# EAGLE board iot-home-control-board (EAGLE 7.3.0)
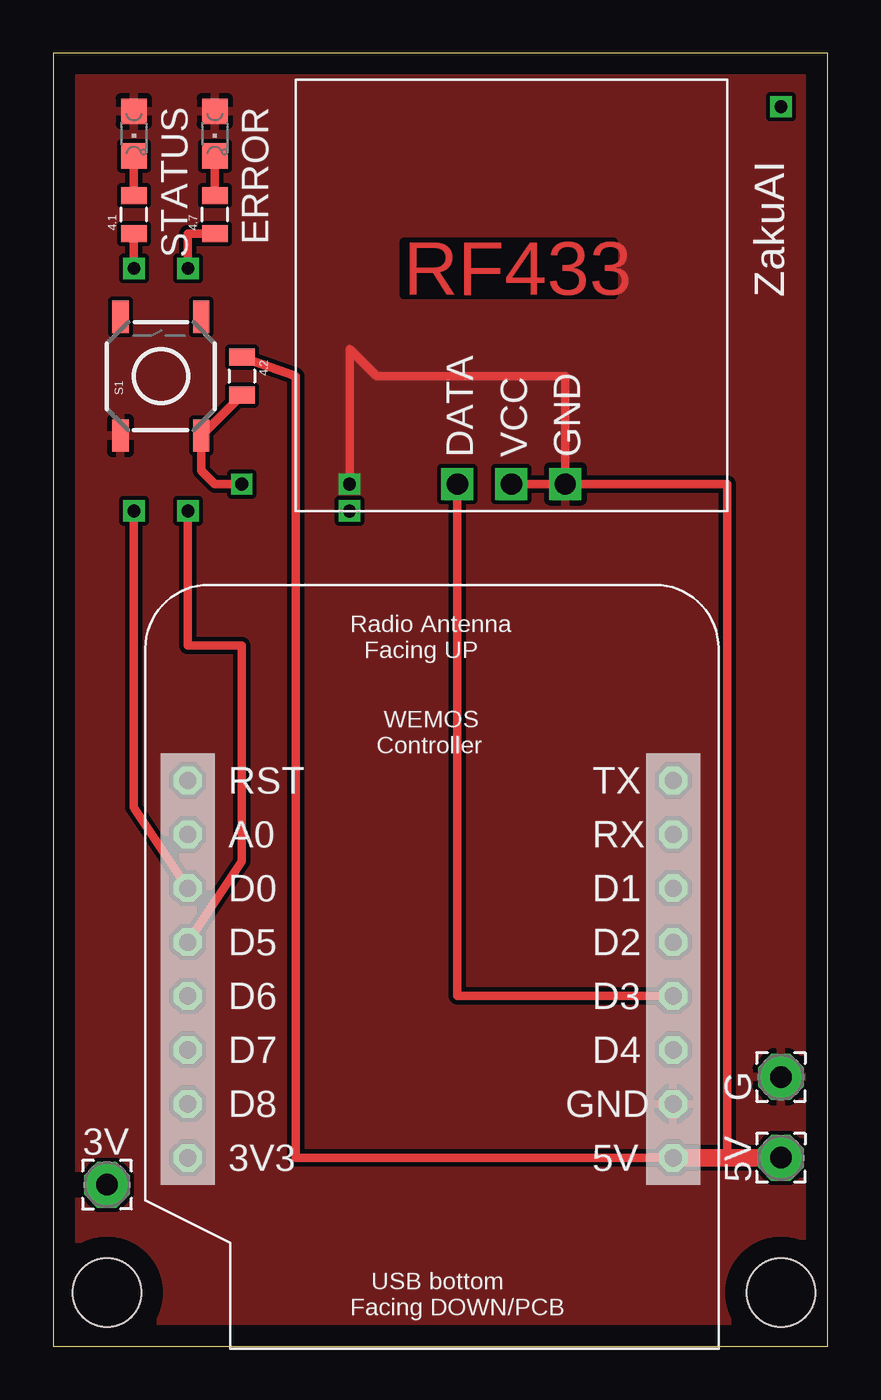
[diagram p0: board, top side]
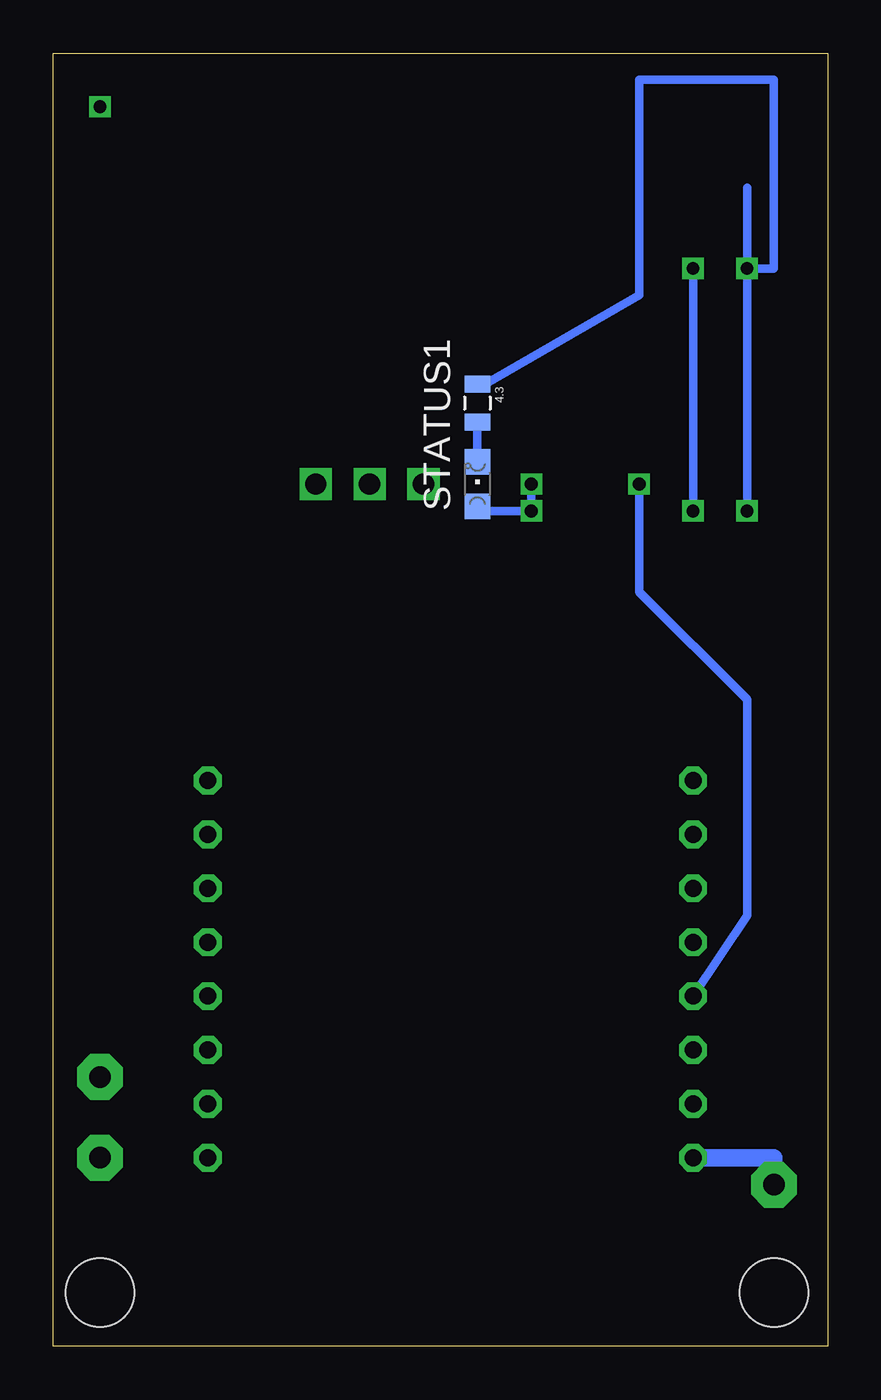
[diagram p1: board, bottom side, seen from below]

Size 36.5 x 60.95 mm. Coordinates in mm from the lower left corner, seen from the top.
Outline: 0,0 36.5,0 36.5,60.95 0,60.95 0,0
Copper layers (1*16): Top 0.035mm / dielectric 1.5mm / Bottom 0.035mm
Design rules "default": minimum track width 10mil, minimum drill 24mil, track to track 8mil, track to pad 8mil, pad to pad 8mil, via to via 8mil, smd to smd 8mil, copper to edge 40mil, drill to drill 8mil, minimum pad ring 10mil, minimum via ring 8mil, stop-mask expansion 4mil, vias tented up to drill 0mil, thermal gap 10mil
Holes 3.2 mm at 2.54,2.54 34.29,2.54

## Footprints (pad centres in the part's own frame; a part is rotated, then mirrored left to right if it is on the bottom)
2,15/1,0 = drill 1.016 pad 2.159 octagon: 1 0,0
0805 = smd 0.8 x 1.2: 1 -0.9,0; 2 0.9,0
CHIPLED_0805 = smd 1.2 x 1.2: A 0,-1.05; C 0,1.05
TACTILE-SWITCH-SMD = smd 1.524 x 0.762: 1 -2.794,1.905; 2 2.794,1.905; 3 -2.794,-1.905; 4 2.794,-1.905
WEMOS = drill 0.8 octagon: 3V3 0,0; 5V 22.86,0; A0 0,15.24; D0 0,12.7; D1 22.86,12.7; D2 22.86,10.16; D3 22.86,7.62; D4 22.86,5.08; D5 0,10.16; D6 0,7.62; D7 0,5.08; D8 0,2.54; GND 22.86,2.54; RST 0,17.78; RX 22.86,15.24; TX 22.86,17.78
433MHZ = drill 1 square: DATA 7.62,1.27; GND 12.7,1.27; VCC 10.16,1.27

## Placement (x,y rotation side)
3V  3v  [2,15/1,0]  2.54,7.62 0 top
4.1  [0805]  3.81,53.34 90 top
4.2  [0805]  8.89,45.72 270 top
4.3  [0805]  16.51,44.45 270 bottom
4.7  [0805]  7.62,53.34 90 top
5V  5V  [2,15/1,0]  34.29,8.89 90 top
ERROR  [CHIPLED_0805]  7.62,57.15 180 top
G  GND  [2,15/1,0]  34.29,12.7 90 top
S1  TAC_SWITCHSMD  [TACTILE-SWITCH-SMD]  5.08,45.72 90 top
STATUS  [CHIPLED_0805]  3.81,57.15 180 top
STATUS1  [CHIPLED_0805]  16.51,40.64 0 bottom
U$1  WEMOS  [WEMOS]  6.35,8.89 0 top
U$2  [433MHZ]  11.43,39.37 0 top

## Library data of the parts
3V 5V G = wirepad
4.1-4.3 4.7 = SparkFun-Passives
ERROR STATUS STATUS1 = led
S1 = SparkFun-Retired; PROD_ID: SWCH-08247
U$1 = wemos
U$2 = rf433

## Nets
GND: ERROR.A G.1 S1.1 STATUS1.A STATUS.A U$1.GND U$2.GND
N$1: U$1.D3 U$2.DATA
N$2: 4.7.1 U$1.D5
N$3: 4.7.2 ERROR.C
N$4: 4.1.1 4.3.1 U$1.D0
N$5: 4.1.2 STATUS.C
N$7: 3V.1 U$1.3V3
N$8: 4.3.2 STATUS1.C
N$10: 4.2.2 S1.3 U$1.D6
VCC: 4.2.1 5V.1 U$1.5V U$2.VCC

## Tracks (layer width: path | path; a pad name or v marks a point on that pad's centre or on a via)
GND  (via drill 0.6)
  Top 0.406: v13.97,40.64 13.97,46.99 15.24,45.72 24.13,45.72 U$2.GND
  Bottom 0.406: STATUS1.A 16.29,39.37 13.97,39.37 v13.97,40.64
  pour Top: 0,0 0,60.96 38.1,60.96 38.1,0
N$1
  Top 0.406: U$2.DATA 19.05,16.51 U$1.D3
N$2  (via drill 0.6)
  Top 0.406: 4.7.1 6.35,52.44 v6.35,50.8 | U$1.D5 8.89,22.86 8.89,33.02 6.35,33.02 v6.35,39.37
  Bottom 0.406: v6.35,50.8 v6.35,39.37
N$3
  Top 0.406: ERROR.C 4.7.2
N$4  (via drill 0.6)
  Top 0.406: U$1.D0 3.81,25.4 v3.81,39.37 | 4.1.1 v3.81,50.8
  Bottom 0.406: v3.81,50.8 v3.81,39.37 | 4.3.1 16.14,45.35 8.89,49.53 8.89,59.69 2.54,59.69 2.54,50.8 v3.81,50.8 | 3.81,54.61 v3.81,50.8
N$5
  Top 0.406: STATUS.C 4.1.2
N$6  (via drill 0.6)
  other vias: 34.29,58.42
N$7
  Bottom 0.813: 3V.1 2.54,8.89 U$1.3V3
N$8
  Bottom 0.406: 4.3.2 STATUS1.C
N$9  (via drill 0.6)
  other vias: 13.97,39.37
N$10  (via drill 0.6)
  Top 0.406: 4.2.2 7.24,43.18 S1.3 6.99,41.27 7.62,40.64 v8.89,40.64
  Bottom 0.406: v8.89,40.64 8.89,35.56 3.81,30.48 3.81,20.32 U$1.D6
VCC
  Top 0.406: 31.75,8.89 31.75,40.64 U$2.VCC | 4.2.1 11.43,45.72 11.43,8.89 U$1.5V
  Top 0.813: 5V.1 31.75,8.89 U$1.5V

## Text on the board
tNames: ZakuAI